# Altium PCB Main.PcbDoc (part 2 of 4)
Units mil, origin at the board's own origin, x right, y up, seen from the top; angles counter-clockwise.
Board outline 4000 x 4000 mil, 4 copper layers (L1-Top, L2-Ground, L3-Power, L4-Bottom), stack 63.556 mil thick; 424 components, 250 nets, 1628 pads, 3310 vias.
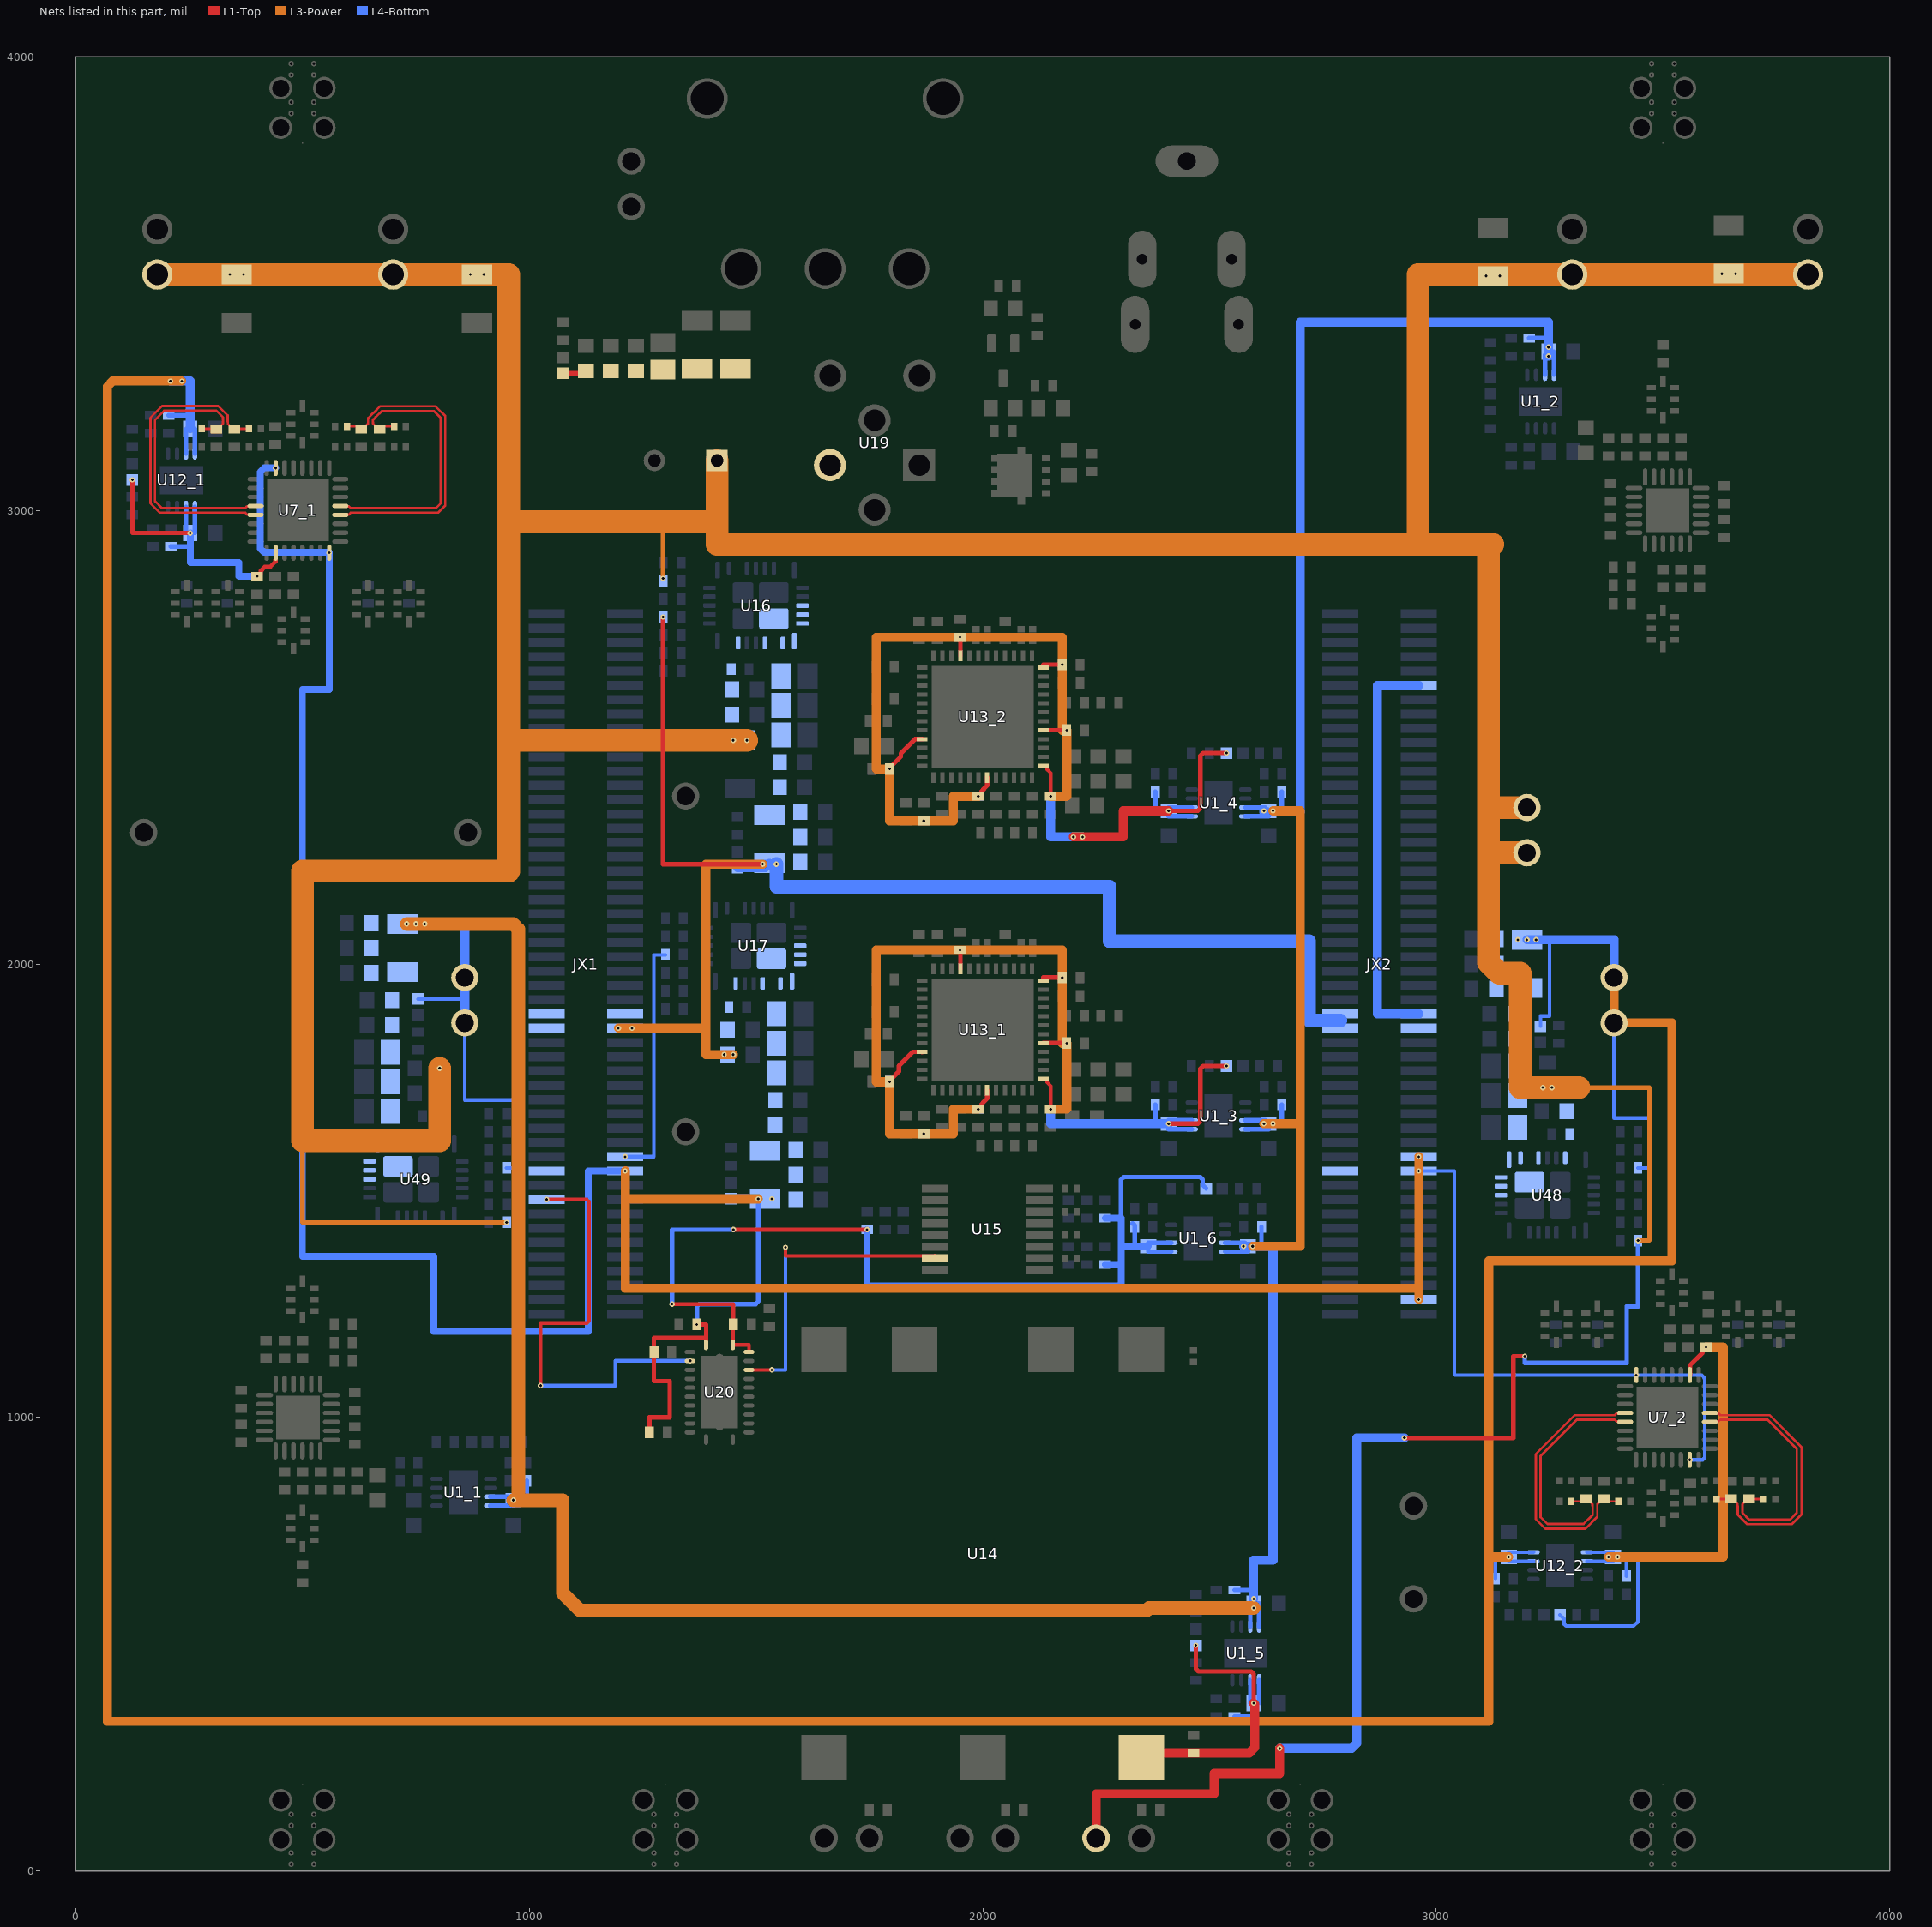
[diagram p4: the nets of this part, all layers, seen from the top]

## Footprints (in the part's own frame and the unit in brackets; to place one, negate y for a bottom-side part, rotate by r counter-clockwise, add the part's x,y. Pads: shape width x height; smd on the part's side, far side on the other; paste and mask are expansions set on the pad) (continued)
"Molex 1718560002 2-pin header with lock" [mil]
  round 67 / inner round 60 / far side round 67 hole 47 paste-99999 mask+0: 1(0,0) 2(100,0)
  silkscreen extent -47,-125 147,125, body extent -47,-125 147,125, height 418
OH320-CC-700503CF-010.0M [mil] "OH320-CC Series Ultra Stable OCXO"
  rect 100x100 smd: 1(-350,-450) 2(0,-450) 3(350,-450) 4(350,450) 5(150,450) 6(-150,450) 7(-350,450)
  silkscreen extent -443,-510 -423,-490, body extent -437,-504 437,504, height 567
RHL0024A [mm] "SN74AXC8T245 8-Bit Dual-Supply Bus Transceiver With Configurable Voltage Translation  and Tri-State Outputs"
  oval 0.24x0.6 smd paste+0 mask+0.051: 1(-0.75,2.65) 12(-0.75,-2.65) 13(0.75,-2.65) 24(0.75,2.65)
  oval 0.6x0.24 smd paste+0 mask+0.051: 2(-1.65,2.25) 3(-1.65,1.75) 4(-1.65,1.25) 5(-1.65,0.75) 6(-1.65,0.25) 7(-1.65,-0.25) 8(-1.65,-0.75) 9(-1.65,-1.25) 10(-1.65,-1.75) 11(-1.65,-2.25) 14(1.65,-2.25) 15(1.65,-1.75) 16(1.65,-1.25) 17(1.65,-0.75) 18(1.65,-0.25) 19(1.65,0.25) 20(1.65,0.75) 21(1.65,1.25) 22(1.65,1.75) 23(1.65,2.25)
  round 0.5 smd paste-2.54 mask+0: 25(-0.787,-0.025) 25(0,-1.9) 25(0,1.9) 25(0.775,0)
  rect 2.05x4.05 smd paste-2.012 mask+0.051: 25(0,0)
  L1-Top region: 0.396,-2.75 0.396,-2 0.154,-2 0.154,-2.75
  L1-Top region: -0.152,-2.75 -0.152,-2 -0.394,-2 -0.394,-2.75
  L1-Top region: -0.395,2.225 -0.395,2.024 0.395,2.024 0.395,2.225
  L1-Top region: 0.152,2.75 0.152,2 0.394,2 0.394,2.75
  L1-Top region: -0.396,2.75 -0.396,2 -0.154,2 -0.154,2.75
  L1-Top region: -0.395,-2.024 -0.395,-2.225 0.395,-2.225 0.395,-2.024
  silkscreen extent -1.95,-2.95 1.95,2.95, body extent -1.75,-2.75 1.75,2.75, height 0.25
SMD-0402 [mm] "0402 Imperial"
  rect 0.5x0.65 smd mask+0.05: 1(-0.5,0) 2(0.5,0)
  body extent -0.5,-0.25 0.5,0.25, height 0.56
SMD-0603 [mm] "SMD Body 1.6x0.8mm, IPC High Density"
  rect 0.8x0.9 smd paste-0.045 mask+0.025: 1(-0.7,0) 2(0.7,0)
  body extent -0.87,-0.48 0.87,0.48, height 1.3
SMD-0805 [mm] "Chip Capacitor, Body 2.0x1.3mm, IPC High Density, 0805 Imperial, 2012 Metric"
  rect 1.1x1.4 smd paste-0.065 mask+0.025: 1(-0.75,0) 2(0.75,0)
  body extent -1.1,-0.72 1.1,0.72, height 1.4
SMD-1206 [mm] "Chip Capacitor, Body 3.2x1.6mm, IPC High Density"
  rect 1.1x1.7 smd: 1(-1.35,0) 2(1.35,0)
  silkscreen extent -0.4,-0.75 0.4,0.75, body extent -1.7,-0.9 1.7,0.9, height 1.3
"TI LMX2820" [mm]
  rect 0.6x0.24 smd paste+0 mask+0: 1(-3.4,2.75) 2(-3.4,2.25) 3(-3.4,1.75) 4(-3.4,1.25) 5(-3.4,0.75) 6(-3.4,0.25) 7(-3.4,-0.25) 8(-3.4,-0.75) 9(-3.4,-1.25) 10(-3.4,-1.75) 11(-3.4,-2.25) 12(-3.4,-2.75) 25(3.4,-2.75) 26(3.4,-2.25) 27(3.4,-1.75) 28(3.4,-1.25) 29(3.4,-0.75) 30(3.4,-0.25) 31(3.4,0.25) 32(3.4,0.75) 33(3.4,1.25) 34(3.4,1.75) 35(3.4,2.25) 36(3.4,2.75)
  rect 0.24x0.6 smd paste+0 mask+0: 13(-2.75,-3.4) 14(-2.25,-3.4) 15(-1.75,-3.4) 16(-1.25,-3.4) 17(-0.75,-3.4) 18(-0.25,-3.4) 19(0.25,-3.4) 20(0.75,-3.4) 21(1.25,-3.4) 22(1.75,-3.4) 23(2.25,-3.4) 24(2.75,-3.4) 37(2.75,3.4) 38(2.25,3.4) 39(1.75,3.4) 40(1.25,3.4) 41(0.75,3.4) 42(0.25,3.4) 43(-0.25,3.4) 44(-0.75,3.4) 45(-1.25,3.4) 46(-1.75,3.4) 47(-2.25,3.4) 48(-2.75,3.4)
  rect 5.7x5.7 smd paste-2.837 mask+0: 49(0,0)
  silkscreen extent -4.06,-3.55 3.55,4.06, body extent -3.5,-3.5 3.5,3.5, height 0.85
TI_RGE0024B [mm] "QFN, 24-Leads, Body 4.00x4.00mm, Pitch 0.50mm, Thermal Pad 2.45x2.45mm, IPC Medium Density"
  oval 0.95x0.25 smd paste-0.032 mask+0: 1(-1.875,1.25) 6(-1.875,-1.25) 13(1.875,-1.25) 18(1.875,1.25)
  oval 0.95x0.25 smd mask+0.025: 2(-1.875,0.75) 3(-1.875,0.25) 4(-1.875,-0.25) 5(-1.875,-0.75) 14(1.875,-0.75) 15(1.875,-0.25) 16(1.875,0.25) 17(1.875,0.75)
  oval 0.25x0.95 smd paste-0.032 mask+0: 7(-1.25,-1.875) 12(1.25,-1.875) 19(1.25,1.875) 24(-1.25,1.875)
  oval 0.25x0.95 smd mask+0.025: 8(-0.75,-1.875) 9(-0.25,-1.875) 10(0.25,-1.875) 11(0.75,-1.875) 20(0.75,1.875) 21(0.25,1.875) 22(-0.25,1.875) 23(-0.75,1.875)
  rect 2.45x2.45 smd paste-1.225 mask+0.025: 25(0,0)
  silkscreen extent -2.51,-2.2 2.2,2.51, body extent -2.05,-2.05 2.05,2.05, height 1
TPSM82913DRUR [mm] "QFN, 32-Leads, Body 4.50x5.50mm, Pitch 0.50mm, IPC Medium Density"
  rrect40% 0.925x0.25 smd paste-0.051 mask+0.05: 1(-1.987,2.15) 7(-1.987,-2.15) 13(1.987,-2.15) 19(1.987,2.15)
  rrect40% 0.7x0.25 smd paste-0.051 mask+0.05: 2(-2.1,1.5) 3(-2.1,0.5) 4(-2.1,0) 5(-2.1,-0.5) 6(-2.1,-1) 14(2.1,-1.5) 15(2.1,-0.5) 16(2.1,0) 17(2.1,0.5) 18(2.1,1)
  rrect40% 0.25x0.7 smd paste-0.051 mask+0.05: 8(-1,-2.6) 9(-0.5,-2.6) 10(0,-2.6) 11(0.5,-2.6) 12(1,-2.6) 20(1,2.6) 21(0.5,2.6) 22(0,2.6) 23(-0.5,2.6) 24(-1,2.6)
  rrect21% 1.15x1.15 smd paste-0.575 mask+0.05: 25(-0.725,0.725) 28(0.725,0.725)
  rrect21% 1.15x1.65 smd paste-0.575 mask+0.05: 26(-0.725,-1) 27(0.725,-1)
  L1-Top region: -0.11,-2.265 2.435,-2.265 2.435,-2.95 -0.11,-2.95
  L1-Top region: 0.185,-0.39 2.435,-0.39 2.435,-2.95 0.185,-2.95
  L1-Top region: 2.2,2.275 2.161,2.283 2.129,2.304 2.107,2.337 2.1,2.375 2.1,2.375 2.1,2.575 2.096,2.594 2.085,2.61 2.069,2.621 2.05,2.625 2.05,2.625 1.874,2.625 1.836,2.633 1.804,2.654 1.782,2.687 1.774,2.725 1.774,2.725 1.774,2.9 1.771,2.919 1.76,2.935 1.744,2.946 1.724,2.95 1.724,2.95 1.576,2.95 1.556,2.946 1.54,2.935 1.529,2.919 1.526,2.9 1.526,2.9 1.526,2.15 2.2,2.15
  L1-Top region: 2.2,-2.275 2.161,-2.283 2.129,-2.304 2.107,-2.337 2.1,-2.375 2.1,-2.375 2.1,-2.575 2.096,-2.594 2.085,-2.61 2.069,-2.621 2.05,-2.625 2.05,-2.625 1.874,-2.625 1.836,-2.633 1.804,-2.654 1.782,-2.687 1.774,-2.725 1.774,-2.725 1.774,-2.9 1.771,-2.919 1.76,-2.935 1.744,-2.946 1.724,-2.95 1.724,-2.95 1.576,-2.95 1.556,-2.946 1.54,-2.935 1.529,-2.919 1.526,-2.9 1.526,-2.9 1.526,-2.15 2.2,-2.15
  L1-Top region: -2.2,-2.275 -2.161,-2.283 -2.129,-2.304 -2.107,-2.337 -2.1,-2.375 -2.1,-2.375 -2.1,-2.575 -2.096,-2.594 -2.085,-2.61 -2.069,-2.621 -2.05,-2.625 -2.05,-2.625 -1.874,-2.625 -1.836,-2.633 -1.804,-2.654 -1.782,-2.687 -1.774,-2.725 -1.774,-2.725 -1.774,-2.9 -1.771,-2.919 -1.76,-2.935 -1.744,-2.946 -1.724,-2.95 -1.724,-2.95 -1.576,-2.95 -1.556,-2.946 -1.54,-2.935 -1.529,-2.919 -1.526,-2.9 -1.526,-2.9 -1.526,-2.15 -2.2,-2.15
  L1-Top region: -2.2,1.375 -2.162,1.367 -2.129,1.346 -2.108,1.313 -2.1,1.275 -2.1,1.275 -2.1,1.225 -2.108,1.187 -2.129,1.154 -2.162,1.133 -2.2,1.125 -2.2,1.125 -2.4,1.125 -2.419,1.121 -2.435,1.11 -2.446,1.094 -2.45,1.075 -2.45,1.075 -2.45,0.925 -2.446,0.906 -2.435,0.89 -2.419,0.879 -2.4,0.875 -2.4,0.875 -1.8,0.875 -1.781,0.879 -1.765,0.89 -1.754,0.906 -1.75,0.925 -1.75,0.925 -1.75,1.5 -2.2,1.5
  L1-Top region: -2.2,-1.125 -2.162,-1.133 -2.129,-1.154 -2.108,-1.187 -2.1,-1.225 -2.1,-1.225 -2.1,-1.275 -2.108,-1.313 -2.129,-1.346 -2.162,-1.367 -2.2,-1.375 -2.2,-1.375 -2.4,-1.375 -2.419,-1.379 -2.435,-1.39 -2.446,-1.406 -2.45,-1.425 -2.45,-1.425 -2.45,-1.575 -2.446,-1.594 -2.435,-1.61 -2.419,-1.621 -2.4,-1.625 -2.4,-1.625 -1.8,-1.625 -1.781,-1.621 -1.765,-1.61 -1.754,-1.594 -1.75,-1.575 -1.75,-1.575 -1.75,-1 -2.2,-1
  L1-Top region: -2.2,2.275 -2.162,2.283 -2.129,2.304 -2.108,2.337 -2.1,2.375 -2.1,2.375 -2.1,2.575 -2.096,2.594 -2.085,2.61 -2.069,2.621 -2.05,2.625 -2.05,2.625 -1.875,2.625 -1.837,2.633 -1.804,2.654 -1.783,2.687 -1.775,2.725 -1.775,2.725 -1.775,2.9 -1.771,2.919 -1.76,2.935 -1.744,2.946 -1.725,2.95 -1.725,2.95 -1.576,2.95 -1.557,2.946 -1.541,2.935 -1.53,2.919 -1.526,2.9 -1.526,2.9 -1.526,2.15 -2.2,2.15
  L1-Top region: 2.2,-1.375 2.162,-1.367 2.129,-1.346 2.108,-1.313 2.1,-1.275 2.1,-1.275 2.1,-1.225 2.108,-1.187 2.129,-1.154 2.162,-1.133 2.2,-1.125 2.2,-1.125 2.4,-1.125 2.419,-1.121 2.435,-1.11 2.446,-1.094 2.45,-1.075 2.45,-1.075 2.45,-0.925 2.446,-0.906 2.435,-0.89 2.419,-0.879 2.4,-0.875 2.4,-0.875 1.8,-0.875 1.781,-0.879 1.765,-0.89 1.754,-0.906 1.75,-0.925 1.75,-0.925 1.75,-1.5 2.2,-1.5
  L1-Top region: 2.2,1.125 2.162,1.133 2.129,1.154 2.108,1.187 2.1,1.225 2.1,1.225 2.1,1.275 2.108,1.313 2.129,1.346 2.162,1.367 2.2,1.375 2.2,1.375 2.4,1.375 2.419,1.379 2.435,1.39 2.446,1.406 2.45,1.425 2.45,1.425 2.45,1.575 2.446,1.594 2.435,1.61 2.419,1.621 2.4,1.625 2.4,1.625 1.8,1.625 1.781,1.621 1.765,1.61 1.754,1.594 1.75,1.575 1.75,1.575 1.75,1 2.2,1
  silkscreen extent -2.57,-2.95 2.45,3.07, body extent -2.3,-2.8 2.3,2.8, height 1.9

## Part data
C1_1 C1_2 C1_3 C1_4 C1_5 C1_6 C2_1 C2_2 C2_3 C2_4 C2_5 C2_6 C29_1 C29_2 C30 C30_1 C30_2 C45 C46 C47 C52_1 C52_2 C54_1 C54_2 C55_1 C55_2 C71 C72 C76 C77 C78 C79 C80 C83 C84 C88 C89 C90 C91 C92 C94 C102 C103 C104 C194 C203 C231 C232 C233 C235 C236 C241 C242 C243: library part CAP0603, "Ceramic Capacitor 0603"
C3_1 C3_2 C3_3 C3_4 C3_5 C3_6 C4_1 C4_2 C5_1 C5_2 C6 C6_1 C6_2 C7_1 C7_2 C8_1 C8_2 C9_1 C9_2 C10_1 C10_2 C11_1 C11_2 C12_1 C12_2 C13_1 C13_2 C14_1 C14_2 C16 C19_1 C19_2 C20_1 C20_2 C21_1 C21_2 C22_1 C22_2 C23_1 C23_2 C28_1 C28_2 C31_1 C31_2 C32_1 C32_2 C33_1 C33_2 C34_1 C34_2 C35_1 C35_2 C36_1 C36_2 C37_1 C37_2 C38_1 C38_2 C41_1 C41_2 C42_1 C42_2 C45_1 C45_2 C46_1 C46_2 C47_1 C47_2 C48_1 C48_2 C49_1 C49_2 C50_1 C50_2 C51_1 C51_2 C53_1 C53_2 C56_1 C56_2 C57_1 C57_2 C58_1 C58_2 C59_1 C59_2 C60_1 C60_2 C61 C62 C63 C64 C65 C67 C68 C69 C81 C82 C93 C105 C106 C234 C244: library part CAP0402, "Ceramic Capacitor 0402"
C15_1 C15_2 C16_1 C16_2 C17_1 C17_2 C18_1 C18_2 C24_1 C24_2 C25_1 C25_2 C26_1 C26_2 C27_1 C27_2 C39_1 C39_2 C40_1 C40_2 C43_1 C43_2 C44_1 C44_2 C66: library part CAP0201, "Capacitor 0201 Imperial"
C70 C98 C99 C107 C108 C110 C111: library part CAP1206, "Ceramic Capacitor 1206 Imperial"
C73 C74 C75 C85 C86 C87 C100 C227 C228 C229 C237 C238 C239: library part CAP0805, "Ceramic Capacitor 0805 Imperial (2012 Metric)"
C95 C96 C101: library part CAP0603_HV, "Ceramic Capacitor 0603, 25V"
C97: library part CAP_ELECTRO, "CAP ALUM 330UF 20% 25V RADIAL EEU-FM1E331"
D1_1 D1_2 D1_3 D1_4 D1_5 D1_6 D2_1 D2_2 D3 D4 D5 D13 D18: library part LED0402, "LED 0402"
D6 D7 D8: "LED Through Hole, Right Angle", Arrow Part Number=TLPR5600, Manufacturer_Name=Vishay, Mouser Part Number=78-TLPR5600, Arrow Price/Stock=https://www.arrow.com/en/products/tlpr5600/vishay?region=nac, Datasheet Link=https://www.vishay.com/docs/83043/tlpg5600.pdf, Manufacturer_Part_Number=TLPR5600, Mouser Price/Stock=https://www.mouser.co.uk/ProductDetail/Vishay-Semiconductors/TLPR5600?qs=RzxYCzJDjPV97gjcooV9KQ%3D%3D
FB1_1 FB1_2: library part FB0603, "Ferrite Bead 0603"
FB2 FB3 FB4: library part FB0402, "Ferrite Bead 0402"
J1: "4 _Power_ Position Circular Connector Jack, Female Sockets Solder", Package="DIP-20 Kycon", Availability=Unavailable, MF=Kycon, MP=KPJX-4S, Price=None, SnapEDA_Link=https://www.snapeda.com/parts/KPJX-4S/Kycon/view-part/555404/?ref=snap
J2 J13 J24 J25: "No Description Available", Mfr_Name="Amphenol ICC", RefDes=RefDes, Type=Type
J3 J4 J5 J6 J7 J8: library part "Amphenol 901-10510-1", "SMA Connector Jack, Female Socket 50 Ohms Board Edge, End Launch; Through Hole, Right Angle Solder (Square Flange)", Package=None, Availability=Unavailable, MF=Samtec, MP=SMA-J-P-H-ST-EM1, Price=None, SnapEDA_Link=https://www.snapeda.com/parts/SMA-J-P-H-ST-EM1/Samtec%20Inc./view-part/?ref=snap
J9 J10 J11 J12: "No Description Available", Mfr_Name="Molex Connector Corporation", RefDes=RefDes, Type=Type
JX1: library part "MicroZed JX1", "Bergstak FCI 61083-104400LF"
JX2: library part "MicroZed JX2", "Bergstak FCI 61083-104400LF"
L1_1 L1_2 L2_1 L2_2 L3_1 L3_2 L4_1 L4_2: library part L0402, "Inductor 0402"
L5 L6 L17 L18: library part L1206, "Inductor 1206"
Q1: library part BSS138, "N-Channel Logic Level Enhancement Mode Field Effect Transistor", Package="TO-236-3 Micross", Availability=Unavailable, MF="MICROSS/On Semiconductor", MP=BSS138, Price=None, SnapEDA_Link=https://www.snapeda.com/parts/BSS138/MICROSS/On%20Semiconductor/view-part/?ref=snap
R1_1 R1_2 R1_3 R1_4 R1_5 R1_6 R2_1 R2_2 R2_3 R2_4 R2_5 R2_6 R3_1 R3_2 R3_3 R3_4 R3_5 R3_6 R4_1 R4_2 R4_3 R4_4 R4_5 R4_6 R5_1 R5_2 R5_3 R5_4 R5_5 R5_6 R6_1 R6_2 R7_1 R7_2 R8_1 R8_2 R9_1 R9_2 R10_1 R10_2 R11_1 R11_2 R12_1 R12_2 R13_1 R13_2 R14_1 R14_2 R15_1 R15_2 R16_1 R16_2 R17_1 R17_2 R18_1 R18_2 R19_1 R19_2 R20_1 R20_2 R21_1 R21_2 R22_1 R22_2 R23_1 R23_2 R25_1 R25_2 R26_1 R26_2 R28_1 R28_2 R29_1 R29_2 R34 R35 R36 R37 R38 R39 R40 R41 R42 R43 R44 R45 R46 R47 R48 R49 R50 R51 R52 R53 R54 R55 R56 R57 R58 R59 R60 R61 R62 R66 R90 R91 R92 R93 R94 R95 R96 R97 R98: library part RES0402, "Resistor-0402"
R24_1 R24_2 R27_1 R27_2: library part RES0603, "Resistor-0603"
R30 R31 R32 R33: library part RES0201, "Resistor-0201"
SW1: library part 11-1M2S3AQE2, "SPDT, RIGHT ANGLE, PC THRU-HOLE"
TP1 TP2 TP3 TP4 TP5 TP6: library part Keystone_TP_5000_Series, "Test point 50mil diameter"
U1_1 U1_2 U1_3 U1_4 U1_5 U1_6 U12_1 U12_2: "6.5V, 2A, Ultralow Noise, High PSRR, Fast Transient Response CMOS LDO", RefDes=RefDes, Type=Type
U2_1 U2_2 U4_1 U4_2 U8_1 U8_2 U9_1 U9_2: library part MiniCircuits_LFCG-1400+
U5_1 U5_2 U6_1 U6_2 U10_1 U10_2 U11_1 U11_2: "DC-530MHz LPF"
U13_1 U13_2: "Phase Locked Loops - PLL 22.6-GHz wideband RF synthesizer with phase synchronization, JESD and <5- us frequency calibration 48-VQFN -40 to 85", Manufacturer_Name="Texas Instruments", Mouser Part Number=595-LMX2820RTCT, Arrow Part Number=LMX2820RTCT, Arrow Price/Stock=https://www.arrow.com/en/products/lmx2820rtct/texas-instruments?region=nac, Datasheet Link=https://www.ti.com/lit/ds/symlink/lmx2820.pdf?ts=1616090349546&ref_url=https%253A%252F%252Fwww.ti.com%252Fstore%252Fti%252Fen%252Fp%252Fproduct%252F%253Fp%253DLMX2820RTCT, Geometry.Height=0.9mm, Manufacturer_Part_Number=LMX2820RTCT, Mouser Price/Stock=https://www.mouser.co.uk/ProductDetail/Texas-Instruments/LMX2820RTCT?qs=eP2BKZSCXI4hpj09QD%252Biqg%3D%3D
U14: "Oven Controlled Crystal Oscillator", Arrow Part Number=BAT54SLT1G, Manufacturer_Name=onsemi, Mouser Part Number=863-BAT54SLT1G, Arrow Price/Stock=https://www.arrow.com/en/products/bat54slt1g/on-semiconductor?region=nac, Datasheet Link=http://www.onsemi.com/pub/Collateral/BAT54SLT1-D.PDF, Height=1.11mm, Manufacturer_Part_Number=BAT54SLT1G, Mouser Price/Stock=https://www.mouser.co.uk/ProductDetail/onsemi/BAT54SLT1G?qs=vLkC5FC1VN9oCh8qaBIZiQ%3D%3D
U15: "Low Skew, 1-to-4 Multiplexed Differential/LVCMOS-to-LVCMOS/TTL Fanout Buffer", Manufacturer_Name="Texas Instruments", Mouser Part Number=595-LMK00804BPW, Arrow Part Number=LMK00804BPW, Arrow Price/Stock=https://www.arrow.com/en/products/lmk00804bpw/texas-instruments?region=nac, Datasheet Link=http://www.ti.com/general/docs/lit/getliterature.tsp?genericPartNumber=LMK00804B&&fileType=pdf, Geometry.Height=1.2mm, Manufacturer_Part_Number=LMK00804BPW, Mouser Price/Stock=https://www.mouser.co.uk/ProductDetail/Texas-Instruments/LMK00804BPW?qs=NRIcxvoDUtdlTidVPGucWg%3D%3D
U18: "P-Channel 20-V (D-S) MOSFET"
U19: "Filter: anti-interference; wideband; Mounting: THT; 15A; -40Ã·125Â°", Package="Block-4 Murata", Supplier Part Number 1=490-5055-ND, Digi-Key_Part_Number=490-5055-ND, Digi-Key_Purchase_URL=https://www.digikey.com/product-detail/en/murata-electronics/BNX016-01/490-5055-ND/1825576?utm_source=snapeda&utm_medium=aggregator&utm_campaign=symbol, MF="Murata Electronics", MP=BNX016-01, SnapEDA_Link=https://www.snapeda.com/parts/BNX016-01/Murata%20Electronics%20North%20America/view-part/?ref=snap, Supplier 1=Digi-Key
U20: library part SN74AXC8T245, "SN74AXC8T245"

## Via types
v1: diameter 12, hole 6, L1-Top to L2-Ground, tented top, 1761 vias
v2: diameter 12, hole 6, L1-Top to L4-Bottom, tented both sides, 971 vias
v3: diameter 12, hole 6, L3-Power to L4-Bottom, tented bottom, 308 vias
v4: diameter 12, hole 6, L3-Power to L4-Bottom, tented both sides, 148 vias
v5: diameter 22, hole 10, L1-Top to L4-Bottom, tented top, 48 vias
v6: diameter 22, hole 10, L1-Top to L4-Bottom, 36 vias
v7: diameter 12, hole 6, L1-Top to L2-Ground, tented both sides, 20 vias
v8: diameter 160, hole 120, L1-Top to L4-Bottom, 8 vias
v9: diameter 22, hole 10, L1-Top to L4-Bottom, tented both sides, 4 vias
v10: diameter 80, hole 66.93, L1-Top to L4-Bottom, tented both sides, 2 vias
v11: diameter 40, hole 31.5, L1-Top to L4-Bottom, 2 vias
v12: diameter 60, hole 47.24, L1-Top to L4-Bottom, 2 vias

## Nets (pads, with @x,y where several pads share a name; then routed paths per layer and width w, separated by ;. In a path a pad name is that pad's centre, name@x,y a point inside that pad or via, vN(x,y) a via of type N, cw(c..) or ccw(c..) an arc to the next point about the centre after c; other vN are vias at no path point)
1V8: C90.2 C91.2 C92.2 C106.2 D4.1 JX1.78 JX1.79 JX1.80 JX2.78 JX2.79 JX2.80 JX2.98 L6.2 R42.2 R57.1 R58.1 U7_1.7 U7_1.24 U7_2.7 U7_2.24 U20.1 | length 8581.1
  L1-Top w10: R58.1@1265,967.09 1265,1000 1310,1000 1310,1080 1275,1080 R57.1@1275,1144.25 1275,1175 1390,1175 ; v2(1369.68,1205) 1390,1205 1390,1175 ; U20.1@1390,1160 1390,1175
  L3-Power w20: v2(1211.61,1543.31) 1211.61,1481.85 ; v2(1505,1481.85) 1211.61,1481.85 ; v2(2961.61,1259.84) 2961.61,1285 ; v2(2961.61,1574.8) v2(2961.61,1543.31) 2961.61,1285 ; 1211.61,1481.85 1211.61,1285 2961.61,1285
  L4-Bottom w8: v2(1211.61,1574.8) 1275,1574.8 1275,2020 R42.2@1300.32,2020 ; v2(2961.61,1543.31) 3040,1543.31 3040,1093.5 v2(3441.1,1093.5) 3585.31,1093.5 3590,1088.82 3590,1087.29 3592,1085.29 3592,911.18 3587.31,906.5 v2(3559.21,906.5)
  L4-Bottom w10: v2(1369.68,1205) 1369.68,1244.14 1375.54,1250 1499.14,1250 1505,1255.86 v2(1505,1481.85)
  L4-Bottom w15: v2(440.79,3093.5) 415.29,3093.5 406.5,3084.72 406.5,2916.21 415.29,2907.43 558.9,2907.43 558.9,2605 500,2605 500,1355 790,1355 790,1190 1130,1190 1130,1543.31 v2(1211.61,1543.31)
  L4-Bottom w20: D4.1@1445,1482.28 L6.2@1505,1482.28
  other v2: 1535,1481.85 558.9,2906.5
1V8_PRE_FB: C85.2 C86.2 C87.2 C88.2 C89.2 L6.1 U17.10 U17.11 U17.12 U17.13 U17.14 U17.15 U17.27
3V3: C1_6.2 C105.2 D1_6.1 FB2.1 FB3.1 FB4.1 R1_6.2 U1_6.1 U1_6.2 U20.23 U20.24 | length 2300.9
  L1-Top w8: v2(1315,1250) 1450.32,1250 C105.2@1450.32,1205 1449.06,1205 U20.24@1449.06,1160 1484.49,1160 U20.23@1484.49,1144.25
  L1-Top w10: v2(1450.32,1414.02) v2(1745,1414.02)
  L4-Bottom w10: v2(1315,1250) 1315,1414.02 v2(1450.32,1414.02) ; 2305,1439.29 2305,1524.14 2310.86,1530 2479.08,1530 2484.94,1524.14 2484.94,1512.66 D1_6.1@2492.6,1505 ; R1_6.2@2330.47,1427.8 2335.32,1422.95 R1_6.2@2335.32,1420 2335.32,1377.56 ; U1_6.1@2415.94,1365.47 2365,1365.47 C1_6.2@2365,1377.56 2365,1385.16 U1_6.2@2415.94,1385.16
  L4-Bottom w15: v2(1745,1414.02) 1745,1290 2305,1290 2305,1337.24 ; FB3.1@2270,1337.24 2305,1337.24 ; FB4.1@2270,1439.29 2305,1439.29 2305,1377.56 ; C1_6.2@2365,1377.56 2335.32,1377.56 2305,1377.56 ; 2305,1337.24 2305,1377.56
3V3_LDO_Crystal: C1_5.2 C65.2 D1_5.1 R1_5.2 U1_5.1 U1_5.2 U14.3 | length 795.4
  L1-Top w10: U14.3@2350,250 U14.3@2350.32,250.32 ; v2(2470,497.6) 2470,445.86 2475.86,440 2591.58,440 2597.44,434.14 v2(2597.44,370)
  L1-Top w20: U14.3@2350.32,260.32 2587.97,260.32 2599.68,272.03 2599.68,367.76 v2(2597.44,370)
  L4-Bottom w10: R1_5.2@2555,340.32 2597.44,340.32 v2(2597.44,370) ; U1_5.2@2589.84,420.94 2589.84,370 v2(2597.44,370) ; U1_5.1@2609.53,420.94 2609.53,370 v2(2597.44,370)
3V3_LDO_LMX_1: C1_3.2 C32_1.2 C33_1.2 C34_1.2 C35_1.2 C36_1.2 C37_1.2 C38_1.2 C41_1.2 C42_1.2 C45_1.2 C46_1.2 D1_3.1 R1_3.2 R25_1.2 U1_3.1 U1_3.2 U13_1.7 U13_1.13 U13_1.17 U13_1.24 U13_1.33 U13_1.45 | length 2567.6
  L1-Top w8: U13_1.13@2133.86,1746.73 2140.94,1746.73 2141.67,1746.01 2141.67,1738.92 2150,1730.59 v2(2150,1679.68)
  L1-Top w10: C45_1.2@1794.68,1742.95 1799.53,1747.8 1800.03,1747.8 1815,1762.76 1815,1775 1846.1,1806.1 1855.97,1806.1 1856.01,1806.06 1865.87,1806.06 U13_1.45@1866.14,1805.79 ; v2(1950,2030.32) 1950.79,2029.53 U13_1.33@1950.79,1988.86 ; C36_1.2@1992.95,1679.68 1997.8,1684.53 1997.8,1691.03 2002.2,1695.44 2002.2,1695.74 2009.84,1703.38 U13_1.7@2009.84,1721.14 ; U13_1.17@2133.86,1825.47 C42_1.2@2185.32,1825.47 ; U13_1.24@2133.86,1963.27 2133.86,1970 v2(2175.32,1970) ; v2(2410,1647.56) 2474.14,1647.56 2480,1653.42 2480,1769.14 2485.86,1775 v2(2537.6,1775)
  L3-Power w20: v2(1990,1679.68) 1935,1679.68 1935,1625.32 v2(1870,1625.32) 1794.68,1625.32 v2(1794.68,1740) 1765,1740 1765,2030.32 v2(1950,2030.32) 2175.32,2030.32 v2(2175.32,1970) 2175.32,1825 v2(2185.32,1825) 2185.32,1679.68 v2(2150,1679.68)
  L4-Bottom w10: 2380.32,1647.56 R1_3.2@2380.32,1690 ; U1_3.1@2460.94,1635.47 2410,1635.47 v2(2410,1647.56) 2410,1655.16 U1_3.2@2460.94,1655.16
  L4-Bottom w20: v2(2150,1679.68) 2150,1647.56 v2(2410,1647.56)
3V3_LDO_LMX_2: C1_4.2 C32_2.2 C33_2.2 C34_2.2 C35_2.2 C36_2.2 C37_2.2 C38_2.2 C41_2.2 C42_2.2 C45_2.2 C46_2.2 D1_4.1 R1_4.2 R25_2.2 U1_4.1 U1_4.2 U13_2.7 U13_2.13 U13_2.17 U13_2.24 U13_2.33 U13_2.45 | length 2729.6
  L1-Top w8: U13_2.13@2133.86,2436.73 2140.94,2436.73 2141.67,2436.01 2141.67,2428.92 2150,2420.59 v2(2150,2369.68)
  L1-Top w10: C45_2.2@1794.68,2432.95 1799.53,2437.8 1800.03,2437.8 1819.33,2457.09 1819.33,2464.11 1851.32,2496.1 1866.14,2496.1 U13_2.45@1866.14,2495.79 ; v2(1950,2720.32) 1950.79,2719.53 U13_2.33@1950.79,2678.86 ; C36_2.2@1992.95,2369.68 1997.8,2374.53 1997.8,2381.03 2002.2,2385.44 2002.2,2385.74 2009.84,2393.38 U13_2.7@2009.84,2411.14 ; U13_2.17@2133.86,2515.47 C42_2.2@2185.32,2515.47 ; U13_2.24@2133.86,2653.27 2133.86,2660 v2(2175.32,2660) ; v2(2410,2337.56) 2474.14,2337.56 2480,2343.42 2480,2459.14 2485.86,2465 v2(2537.6,2465)
  L1-Top w20: v2(2200,2280) v2(2220,2280) 2310,2280 2310,2337.56 v2(2410,2337.56)
  L3-Power w20: v2(1990,2369.68) 1935,2369.68 1935,2315.32 v2(1870,2315.32) 1794.68,2315.32 v2(1794.68,2430) 1765,2430 1765,2720.32 v2(1950,2720.32) 2175.32,2720.32 v2(2175.32,2660) 2175.32,2515 v2(2185.32,2515) 2185.32,2369.68 v2(2150,2369.68)
  L4-Bottom w10: R1_4.2@2380.32,2380 2380.32,2337.56 v2(2410,2337.56) ; U1_4.1@2460.94,2325.47 2410,2325.47 v2(2410,2337.56) ; U1_4.2@2460.94,2345.16 2410,2345.16 v2(2410,2337.56)
  L4-Bottom w20: v2(2150,2369.68) 2150,2280 v2(2220,2280)
3V7_Buck: C2_1.2 C2_2.2 C2_3.2 C2_4.2 C2_5.2 C2_6.2 C241.2 C242.2 C243.2 D18.1 J25.1 J25.2 L18.2 R2_1.2 R2_2.2 R2_3.2 R2_4.2 R2_5.2 R2_6.2 R94.2 U1_1.7 U1_1.8 U1_2.7 U1_2.8 U1_3.7 U1_3.8 U1_4.7 U1_4.8 U1_5.7 U1_5.8 U1_6.7 U1_6.8 | length 9146.8
  L3-Power w20: v2(2595,1377.56) 2700,1377.56 2700,1640 ; v2(2620,1647.56) v2(2640,1647.56) 2700,1647.56 2700,1640 ; v2(2640,2337.56) 2700,2337.56 2700,1640
  L3-Power w30: v2(730,2088.15) v2(750,2088.15) v2(770,2088.15) 964.28,2088.15 976,2076.43 976,817.56 v2(965,817.56) 1074,817.56 1074,612.57 1112.57,574 2360.77,574 2366.77,580 v2(2597.44,580)
  L4-Bottom w8: D18.1@755,1922.72 858,1922.72 ; J25.2@858,1870 858,1700 975,1700 975,1550 R94.2@949.68,1550
  L4-Bottom w10: U1_1.8@914.06,805.47 965,805.47 v2(965,817.56) ; U1_1.7@914.06,825.16 957.4,825.16 v2(965,817.56) ; R2_1.2@994.68,860 994.68,817.56 v2(965,817.56) ; U1_6.8@2534.06,1365.47 2585,1365.47 C2_6.2@2585,1377.56 2577.4,1385.16 U1_6.7@2534.06,1385.16 ; R2_5.2@2555,619.68 2597.44,619.68 ; U1_3.8@2579.06,1635.47 2630,1635.47 C2_3.2@2630,1647.56 2622.4,1655.16 U1_3.7@2579.06,1655.16 ; U1_4.8@2579.06,2325.47 2630,2325.47 C2_4.2@2630,2337.56 2622.4,2345.16 U1_4.7@2579.06,2345.16 ; U1_5.7@2589.84,539.06 C2_5.2@2589.84,582.4 ; C2_5.2@2597.44,590 2609.53,590 U1_5.8@2609.53,539.06 ; 2614.68,1377.56 R2_6.2@2614.68,1420 ; v2(2640,1647.56) 2659.68,1647.56 R2_3.2@2659.68,1690 ; 2659.68,2337.56 R2_4.2@2659.68,2380 ; R2_2.2@3205,3379.69 3247.44,3379.69 ; U1_2.7@3239.84,3299.06 3239.84,3342.4 C2_2.2@3247.44,3350 3259.53,3350 U1_2.8@3259.53,3299.06
  L4-Bottom w20: v2(750,2088.15) v2(770,2088.15) 858,2088.15 J25.1@858,1970 858,1922.72 J25.2@858,1870 ; v2(2575,1377.56) C2_6.2@2585,1377.56 v2(2595,1377.56) 2614.68,1377.56 2640,1377.56 2640,685 2597.44,685 2597.44,619.68 v2(2597.44,600) ; v2(2620,2337.56) 2620,2335 2700,2335 2700,3415 3247.44,3415 3247.44,3379.69 v2(3247.44,3360) C2_2.2@3247.44,3350 v2(3247.44,3340)
3V7_PRE_FB: C46.2 C47.2 C237.2 C238.2 C239.2 L18.1 U49.10 U49.11 U49.12 U49.13 U49.14 U49.15 U49.27
5V0_LDO_1: C28_1.1 C29_1.2 D2_1.1 R16_1.2 U7_1.18 U12_1.1 U12_1.2 | length 739.2
  L1-Top w10: v2(125,3067.28) 125,2950 v2(252.44,2950) ; C28_1.1@402.95,2854.68 407.8,2859.53 407.8,2866.33 416.46,2875 428.18,2875 440.47,2887.29 440.47,2890.47 440.79,2890.79 U7_1.18@440.79,2906.5
  L4-Bottom w10: R16_1.2@210,2920.32 252.44,2920.32 ; U12_1.2@243.15,3007.55 243.15,2950 v2(252.44,2950) 262.84,2950 U12_1.1@262.84,3007.55
  L4-Bottom w15: v2(252.44,2950) 252.44,2885 360,2885 360,2854.68 v2(400,2854.68)
5V0_LDO_2: C28_2.1 C29_2.2 D2_2.1 R16_2.2 U7_2.18 U12_2.1 U12_2.2 | length 1390
  L1-Top w10: U7_2.18@3559.21,1093.5 3559.53,1093.5 3559.53,1115.1 3587.2,1142.78 3587.2,1150.47 3592.05,1155.32 C28_2.1@3595,1155.32
  L3-Power w20: v2(3380,692.44) v2(3400,692.44) 3632.75,692.44 3632.75,1155 v2(3595,1155)
  L4-Bottom w8: D2_2.1@3272.72,565 3281.51,556.2 3281.51,544.69 3286.2,540 3435.31,540 3445,549.69 3445,692.44 3419.69,692.44 ; U12_2.2@3332.45,683.15 3390,683.15 C29_2.2@3390,692.44 3390,702.84 U12_2.1@3332.45,702.84 ; v2(3400,692.44) 3419.69,692.44 ; R16_2.2@3419.69,650 3419.69,692.44
5V0_PRE_FB: C73.2 C74.2 C75.2 C76.2 C77.2 L5.1 U16.10 U16.11 U16.12 U16.13 U16.14 U16.15 U16.27
5V0_Zynq: C78.2 C79.2 C80.2 C82.1 C83.2 C84.2 D3.1 JX1.57 JX1.58 JX1.59 JX1.60 JX2.12 JX2.57 JX2.58 JX2.59 JX2.60 L5.2 R36.2 U17.18 | length 4171.6
  L1-Top w10: v2(1295,2765) 1295,2220 v2(1515,2220)
  L3-Power w20: v2(1196.61,1858.27) v2(1226.61,1858.27) 1390,1858.27 1390,1850 ; v4(1450,1800) v4(1430,1800) 1390,1800 1390,1850 ; v2(1515,2220) 1390,2220 1390,1850
  L4-Bottom w20: D3.1@1460,2212.28 1520.43,2212.28 L5.2@1530,2221.85 ; v2(1515,2220) v2(1545,2220) ; JX2.58@2961.61,1889.76 2870,1889.76 2870,2614.17 JX2.12@2961.61,2614.17
  L4-Bottom w30: v2(1545,2220) 1545,2170 2280,2170 2280,2050 2720,2050 2720,1875 2788.39,1875
5V5_Buck: C30_1.2 C30_2.2 C231.2 C232.2 C233.2 D13.1 J24.1 J24.2 L17.2 R17_1.2 R17_2.2 R56.2 U12_1.7 U12_1.8 U12_2.7 U12_2.8 | length 9812.9
  L3-Power w20: v2(233.79,3285) v2(208.79,3285) 81.72,3285 70,3273.28 70,330 3115.86,330 3115.86,692.44 ; v2(3160,692.44) 3115.86,692.44 ; J24.2@3392,1970 J24.1@3392,1870 3520,1870 3520,1345 3115.86,1345 3115.86,692.44
  L4-Bottom w8: R17_2.2@3130.31,645 3130.31,692.44 v2(3160,692.44) ; U12_2.7@3214.34,683.15 3160,683.15 v2(3160,692.44) ; U12_2.8@3214.34,702.84 3160,702.84 v2(3160,692.44) ; D13.1@3230,1862.72 3230,1885 3250,1885 3250,2053.15 ; J24.1@3392,1870 3392,1660 3470,1660 3470,1550 R56.2@3444.69,1550
  L4-Bottom w10: R17_1.2@205,3209.69 252.44,3209.69 ; U12_1.7@243.15,3125.66 243.15,3180 C30_1.2@252.44,3180 262.84,3180 U12_1.8@262.84,3125.66
  L4-Bottom w20: v2(208.79,3285) v2(233.79,3285) 252.44,3285 252.44,3209.69 C30_1.2@252.44,3180 ; v2(3200,2053.15) v2(3220,2053.15) 3250,2053.15 3392,2053.15 J24.2@3392,1970
  other v2: 3180,2053.15
5V5_PRE_FB: C30.2 C45.2 C227.2 C228.2 C229.2 L17.1 U48.10 U48.11 U48.12 U48.13 U48.14 U48.15 U48.27
12V0: C6.1 C16.1 C69.1 C70.2 C71.2 C72.2 C97.1 C98.2 C99.2 C100.2 C101.2 C102.2 C103.2 C107.2 C108.2 C110.2 C111.2 C194.2 C203.2 C235.2 C236.2 D5.1 D6.2 J9.1 J10.1 J11.1 J12.1 J13.1 J13.2 R34.2 R53.2 R92.2 U16.18 U19.5 U48.18 U49.18 | length 13390.8
  L1-Top w10: D5.1@1075,3302.28 1119.84,3302.28 C103.2@1125,3307.44 ; v2(2930,955) 3170,955 3170,1135 v2(3195,1135)
  L1-Top w20: D6.2@2250,72.44 2250,170 2510,170 2510,215 2655,215 v2(2655,270)
  L3-Power w10: 500,1610 500,1430 v2(950,1430) ; v2(1295,2850) 1295,2975 1315,2975 ; 3315,1727.44 3470,1727.44 3470,1390 v2(3445,1390)
  L3-Power w40: 3115,2345 3115,2360 ; 3115,2915 3125,2925
  L3-Power w50: J11.1@180,3520 v2(340,3520) v2(370,3520) J12.1@700,3520 v2(870,3520) v2(900,3520) 955,3520 955,2975 ; v2(802.56,1770) 802.56,1610 500,1610 500,2205 955,2205 955,2493.15 ; C97.1@1413.9,3110 1413.9,2975 ; v2(1480,2493.15) v2(1450,2493.15) 955,2493.15 ; 3115,2345 J13.2@3200,2345 ; 3115,2915 3115,2360 3115,2245 ; 3125,2925 3025,2925 2960,2925 ; J13.1@3200,2245 3115,2245 ; 3315,1727.44 v2(3255,1727.44) 3185,1727.44 3185,1980 3138.43,1980 3115,2003.43 3115,2245 ; J9.1@3820,3520 J10.1@3300,3520 2960,3520 2960,2925 ; 955,2493.15 955,2565 955,2975 ; 955,2975 1315,2975 1413.9,2975 ; 1413.9,2975 1413.9,2925 2960,2925
  L4-Bottom w10: v2(3195,1135) 3195,1120 3420,1120 3420,1245 3445,1245 v2(3445,1390)
  L4-Bottom w20: v2(2655,270) 2813.28,270 2825,281.72 2825,955 v2(2930,955)
  other v2: 3235,1727.44 3110,3516.85 3140,3516.85 3630,3521.85 3660,3521.85
AI_1_N: C16_1.2 L2_1.2 U7_1.29 | length 641.9
  L1-Top w5.24: U7_1.29@583.5,3009.84 584.38,3008.96 602.3,3008.96 606.14,3005.12 794.59,3005.12 804.68,3015.21 804.68,3204 789.56,3219.12 675.29,3219.12 661.37,3205.2 660.93,3205.2 655.12,3199.4 655.12,3195.05 655.42,3194.76 655.42,3191.31 667.05,3179.69 L2_1.2@670,3179.69 675.32,3185 C16_1.2@702.01,3185
AI_1_P: C15_1.2 L1_1.2 U7_1.28 | length 692.4
  L1-Top w5.24: U7_1.28@583.94,2990.16 584.82,2991.04 602.3,2991.04 606.14,2994.88 798.83,2994.88 814.93,3010.97 814.93,3208.24 793.8,3229.36 671.04,3229.36 657.12,3215.45 656.68,3215.45 644.88,3203.64 644.88,3195.05 644.58,3194.76 644.58,3191.31 632.95,3179.69 L1_1.2@630,3179.69 624.68,3185 C15_1.2@597.99,3185
AI_2_N: C16_2.2 L2_2.2 U7_2.29 | length 563.3
  L1-Top w5.24: C16_2.2@3297.99,815 3324.69,815 L2_2.2@3330,820.32 3332.95,820.32 3344.58,808.69 3344.58,805.24 3344.88,804.95 3344.88,785 3324.88,765 3245,765 3230,780 3230,915 3309.88,994.88 3393.86,994.88 3397.7,991.04 3415.62,991.04 U7_2.29@3416.5,990.16
AI_2_P: C15_2.2 L1_2.2 U7_2.28 | length 614.2
  L1-Top w5.24: C15_2.2@3402.01,815 3372.36,815 3367.05,820.32 3355.42,808.69 3355.42,805.24 3355.12,804.95 3355.12,780.76 3329.12,754.76 3240.76,754.76 3219.76,775.76 3219.76,919.24 3305.63,1005.12 3393.86,1005.12 3397.7,1008.96 3415.62,1008.96 U7_2.28@3416.5,1009.84
AQ_1_N: C26_1.2 L4_1.1 U7_1.12 | length 638.3
  L1-Top w5.24: C26_1.2@277.99,3180 309.68,3180 L4_1.1@310,3179.69 312.95,3179.69 324.58,3191.31 324.58,3194.76 324.88,3195.05 324.88,3205.3 310.17,3220 195,3220 175,3200 175,3020 189.88,3005.12 373.86,3005.12 376.86,3008.12 ; 377.7,3008.96 395.62,3008.96 U7_1.12@396.5,3009.84
AQ_1_P: C27_1.2 L3_1.1 U7_1.13 | length 690.4
  L1-Top w5.24: C27_1.2@382.01,3180 381.69,3179.69 L3_1.1@350,3179.69 347.05,3179.69 335.42,3191.31 335.42,3194.76 335.12,3195.05 335.12,3209.54 314.42,3230.24 190.76,3230.24 164.76,3204.24 164.76,3015.76 185.63,2994.88 373.86,2994.88 377.7,2991.04 395.62,2991.04 U7_1.13@396.5,2990.16
AQ_2_N: C26_2.2 L4_2.1 U7_2.12 | length 563.3
  L1-Top w5.24: U7_2.12@3603.5,990.16 3604.38,991.04 3622.3,991.04 3626.14,994.88 3730.63,994.88 3795,930.51 3795,790 3780,775 3690,775 3675.12,789.88 3675.12,804.95 3675.42,805.24 3675.42,808.69 3687.05,820.32 L4_2.1@3690,820.32 3690.31,820 C26_2.2@3722.01,820
AQ_2_P: C27_2.2 L3_2.1 U7_2.13 | length 614.3
  L1-Top w5.24: U7_2.13@3603.5,1009.84 3604.38,1008.96 3622.3,1008.96 3626.14,1005.12 3734.88,1005.12 3805.24,934.76 3805.24,785.76 3784.24,764.76 3685.76,764.76 3664.88,785.63 3664.88,804.95 3664.58,805.24 3664.58,808.69 3652.95,820.32 L3_2.1@3650,820.32 3649.69,820 C27_2.2@3617.99,820
CLK_SW_1V8: JX1.83 U20.3 | length 990.4
  L1-Top w8: v2(1025,1070) 1025,1208 1127.31,1208 1132,1212.69 1132,1475.63 1127.31,1480.32 v2(1038.39,1480.32)
  L4-Bottom w8: v2(1025,1070) 1190,1070 1190,1125 v2(1355,1125)
CLK_SW_3V3: U15.7 U20.21 | length 703.9
  L1-Top w8: U20.21@1484.49,1104.88 v2(1535,1104.88) ; v2(1565,1375) 1565,1356.02 U15.7@1894.33,1356.02
  L1-Top w10: U15.7@1894.33,1351.02 U15.7@1894.33,1356.02
  L4-Bottom w8: v2(1535,1104.88) 1565,1104.88 v2(1565,1375)

## Text inside footprints (layer, text, board x,y; h text height)
C97: Top Overlay "ANODE" at 1422.8,3145 h30 r90; Top Overlay "CATHODE" at 1285,3145 h30 r90; Top Overlay "+" at 1394.17,3026.01 h59.06
D1_1: Bottom Overlay "CATHODE" at 895.13,970 h10 r180; Bottom Overlay "ANODE" at 862.53,970 h10 r180
D1_2: Bottom Overlay "ANODE" at 3095,3247.53 h10 r270; Bottom Overlay "CATHODE" at 3095,3280.13 h10 r270
D1_3: Bottom Overlay "CATHODE" at 2560.13,1800 h10 r180; Bottom Overlay "ANODE" at 2527.53,1800 h10 r180
D1_4: Bottom Overlay "ANODE" at 2527.53,2490 h10 r180; Bottom Overlay "CATHODE" at 2560.13,2490 h10 r180
D1_5: Bottom Overlay "CATHODE" at 2445,520.13 h10 r270; Bottom Overlay "ANODE" at 2445,487.53 h10 r270
D1_6: Bottom Overlay "ANODE" at 2482.53,1530 h10 r180; Bottom Overlay "CATHODE" at 2515.13,1530 h10 r180
D2_1: Bottom Overlay "CATHODE" at 100,3089.82 h10 r270; Bottom Overlay "ANODE" at 100,3057.22 h10 r270
D2_2: Bottom Overlay "ANODE" at 3282.78,540 h10; Bottom Overlay "CATHODE" at 3250.18,540 h10
D3: Bottom Overlay "CATHODE" at 1435,2234.82 h10 r270; Bottom Overlay "ANODE" at 1435,2202.22 h10 r270
D4: Bottom Overlay "ANODE" at 1420,1472.22 h10 r270; Bottom Overlay "CATHODE" at 1420,1504.82 h10 r270
D5: Top Overlay "CATHODE" at 1100,3324.82 h10 r90; Top Overlay "ANODE" at 1100,3292.22 h10 r90
D13: Bottom Overlay "ANODE" at 3255,1872.78 h10 r90; Bottom Overlay "CATHODE" at 3255,1840.18 h10 r90
D18: Bottom Overlay "CATHODE" at 780,1900.18 h10 r90; Bottom Overlay "ANODE" at 780,1932.78 h10 r90
J9: Top Overlay "TAB" at 3923.05,3531.79 h50 r90
J10: Top Overlay "TAB" at 3403.05,3531.79 h50 r90
J11: Top Overlay "TAB" at 283.05,3531.79 h50 r90
J12: Top Overlay "TAB" at 803.05,3531.79 h50 r90